# Altium PCB WB-AV-4510-CAN.PcbDoc (part 1 of 2)
Units mil, origin at the board's own origin, x right, y up, seen from the top; angles counter-clockwise.
Board outline 5777.56 x 2549.21 mil, 2 copper layers (Top Layer, Bottom Layer); 81 components, 160 nets, 544 pads, 0 vias.
Unrouted connection lines stored in the file: 266.
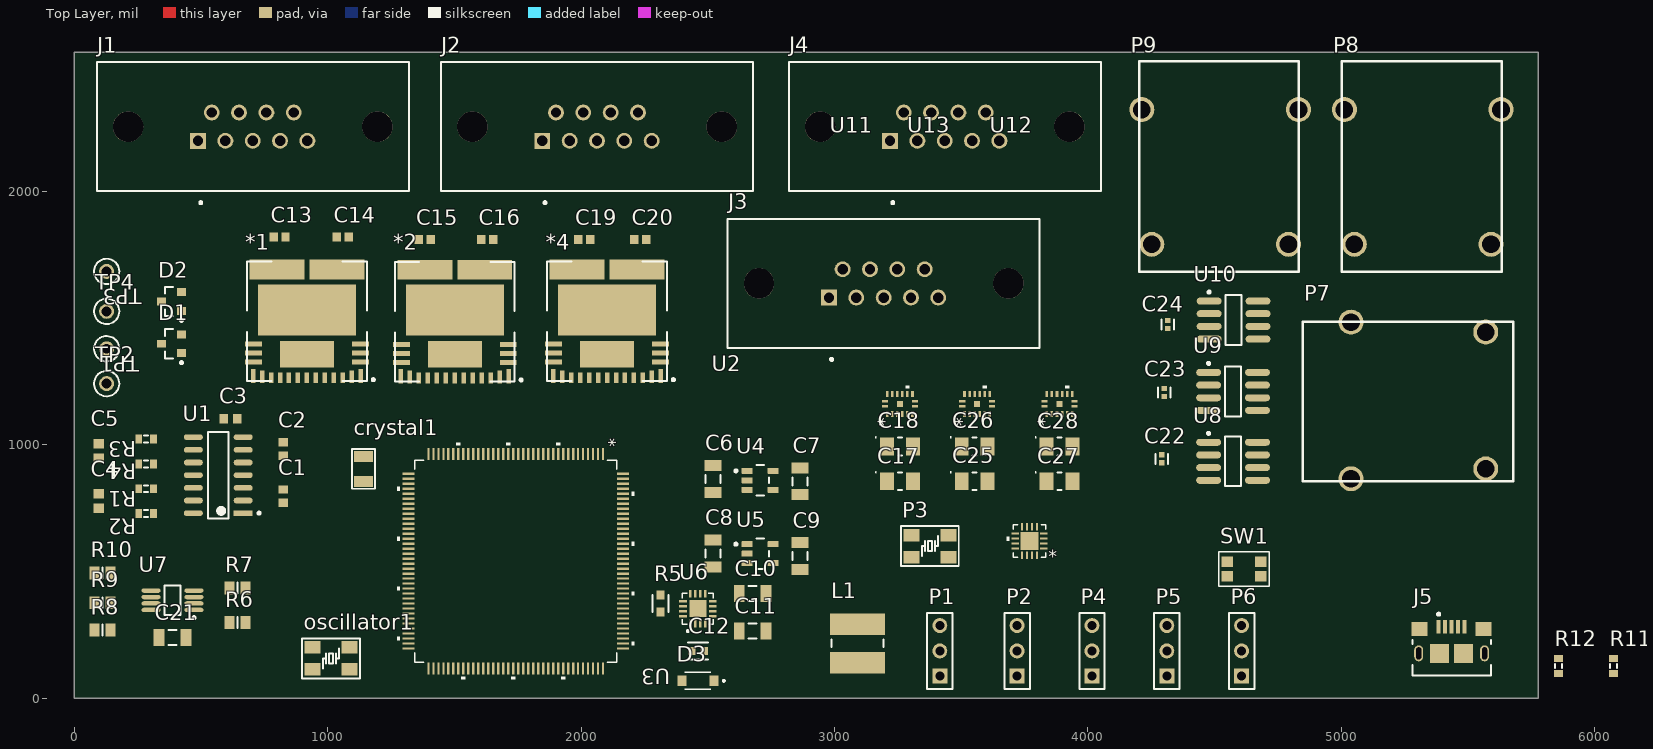
[diagram p0: Top Layer view]
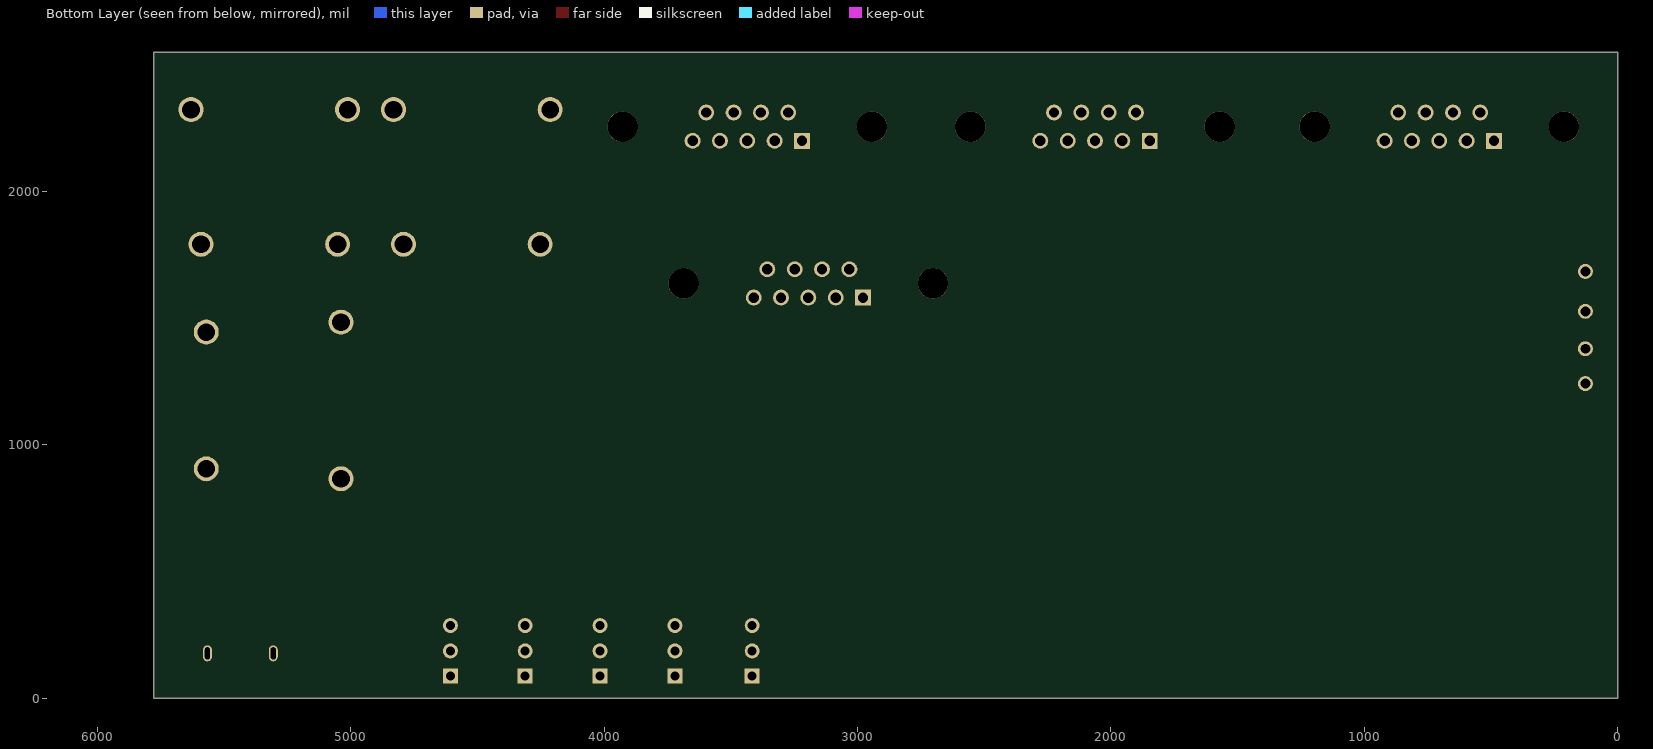
[diagram p1: Bottom Layer view, seen from below]

## Layer stack, top to bottom
Top Solder: solder mask 0.4, Solder Resist, Dk 3.5
Top Layer: signal copper 1.4
Dielectric 1: dielectric 12.6, FR-4, Dk 4.8
Bottom Layer: signal copper 1.4
Bottom Solder: solder mask 0.4, Solder Resist, Dk 3.5

## Board outline
5777.56,0 5777.56,2549.21 0,2549.21 0,0

## Design rules (kind name [scope] priority, off if disabled: settings)
Clearance [All] p1: gap=10 ignorepadtopadclearanceinfootprint=FALSE except(0: Arc-Hole Track-Hole SMDPad-Hole THPad-Hole Via-Hole Fill-Hole Poly-Hole Region-Hole Text-Hole)
DiffPairsRouting [All] p1: maxlimit=10 minlimit=10 mostfreqgap=10 toplayer_minwidth=15 toplayer_maxwidth=15 toplayer_prefwidth=15 bottomlayer_minwidth=15 bottomlayer_maxwidth=15 bottomlayer_prefwidth=15 maxuncoupledlength=500
PolygonConnect [All] p1: connectstyle=Relief reliefconductorwidth=10 reliefentries=4 polygonreliefangle="90 Angle" airgapwidth=10
RoomDefinition CANbus [InComponentClass('CANbus')] p1: confinementstyle=ConfineIn formatcopy=TRUE lockcomponents=FALSE outline 44.83,699.65 44.83,1053.31 63.03,1053.31 63.03,1749.26 71.1,1749.26 71.1,2519.65 1337.95,2519.65 1337.95,1927.4 866.02,1927.4 866.02,733.11 749.52,733.11 749.52,686.18 408.54,686.18 408.54,694.72 224.95,694.72 224.95,699.65
RoomDefinition Thermocouple [InComponentClass('Thermocouple')] p2: confinementstyle=ConfineIn formatcopy=TRUE lockcomponents=FALSE outline 4149.39,1667.83 4149.39,2527.83 4893.92,2527.83 4893.92,2517.99 5693.13,2517.99 5693.13,1657.99 5666.81,1657.99 5666.81,802.93 4806.81,802.93 4806.81,806.06 4396.22,806.06 4396.22,899.45 4252.4,899.45 4252.4,1667.83
RoomDefinition eFuse [InComponentClass('eFuse')] p3: confinementstyle=ConfineIn formatcopy=TRUE lockcomponents=FALSE outline 655.35,1224.25 655.35,1750.16 755.68,1750.16 755.68,1855.47 1429.37,1855.47 1429.37,2519.65 2801.61,2519.65 2801.61,2526.34 4068.46,2526.34 4068.46,2211.59 4213.5,2211.59 4213.5,2211.46 4538.46,2211.46 4538.46,772.42 3591.8,772.42 3591.8,772.55 2961.72,772.55 2961.72,1223.27 1239.02,1223.27 1239.02,1224.25
RoomDefinition Temp_Sensor [InComponentClass('Temp_Sensor')] p4: confinementstyle=ConfineIn formatcopy=TRUE lockcomponents=FALSE outline 45.12,227.2 45.12,536.57 179.29,536.57 179.29,477.52 710.79,477.52 710.79,256.73 478.5,256.73 478.5,189.8 297.09,189.8 297.09,227.2
RoomDefinition MCU [InComponentClass('MCU')] p5: confinementstyle=ConfineIn formatcopy=TRUE lockcomponents=FALSE outline 885.67,64.8 885.67,250.16 1082.52,250.16 1082.52,998.19 1260.13,998.19 1260.13,1038.61 2494.74,1038.61 2494.74,1270.8 4220.19,1270.8 4220.19,728.08 4729.14,728.08 4729.14,567.08 4670.24,567.08 4670.24,23.07 2580.87,23.07 2580.87,14.61 2358.31,14.61 2358.31,59.11 1260.13,59.11 1260.13,64.8
RoutingVias [All] p1: holewidth=28 width=50 viastyle="Through Hole" minholewidth=28 minwidth=50 maxholewidth=28 maxwidth=50
SolderMaskExpansion [All] p1: expansion=4 istentingtop=FALSE
Width [All] p1: maxlimit=10 minlimit=10 preferedwidth=10
29 further rules are at their usual default settings.

## Classes and differential pairs
component class Thermocouple: C22 C23 C24 P7 P8 P9 U8 U9 U10
component class Temp_Sensor: C21 R6 R7 R8 R9 R10 U7
component class eFuse: *1 *2 *4 C13 C14 C15 C16 C17 C18 C19 C20 C25 C26 C27 C28 J2 J3 J4 U11 U12 U13
component class MCU: C6 C7 C8 C9 C10 C11 C12 crystal1 D3 J5 L1 oscillator1 P1 P2 P3 P4 P5 P6 R5 R11 R12 SW1 U2 U3 U4 U5 U6
component class CANbus: C1 C2 C3 C4 C5 D1 D2 J1 R1 R2 R3 R4 TP1 TP2 TP3 TP4 U1
differential pair CAN2: +CAN2_P -CAN2_N
differential pair CAN1: +CAN1_P -CAN1_N

## Components (designator, comment, footprint, x,y, rotation, side; value= is the part's Value field where it differs from the comment)
*1 "MC06XS4200" PQFN50P1200X1200X220_HS-33N 918.31,1487.2 r180 top
*2 "MC06XS4200" PQFN50P1200X1200X220_HS-33N 1501.97,1486.22 r180 top
*4 "MC06XS4200" PQFN50P1200X1200X220_HS-33N 2102.36,1487.2 r180 top
C1 "GRM1885C1H101JA01D" CAPC1608X90X35NL10T15 825.5,797.24 r270 top value=100pF
C2 "GRM1885C1H101JA01D" CAPC1608X90X35NL10T15 825.5,984.25 r270 top value=100pF
C3 "GRM1885C1H101JA01D" CAPC1608X90X35NL10T15 615.86,1102.36 r180 top value=100pF
C4 "GRM188R71H472KA01D" CAPC1608X90X35ML10T15 97.16,777.56 r270 top value=4.7nF
C5 "GRM188R71H472KA01D" CAPC1608X90X35ML10T15 97.16,975.39 r90 top value=4.7nF
C6 "Cap" C1206 2519.68,865.91 r90 top value=22uF
C7 "Cap" C1206 2864.17,856.3 r90 top value=22uF
C8 "Cap" C1206 2519.68,570.87 r90 top value=22uF
C9 "Cap" C1206 2864.17,560.8 r90 top value=22uF
C10 "Cap" C1206 2677.17,412.65 r0 top value=22uF
C11 "Cap" C1206 2677.17,265.02 r0 top value=22uF
C12 "CL10B223KB8NNWC" FP-CL10-IPC_C 2460.63,186.28 r180 top
C13 "Cap" CAPC1608X95X40LL15T15 810.04,1820.87 r180 top value=100pF
C14 "Cap" CAPC1608X95X40LL15T15 1059.06,1820.87 r0 top value=100pF
C15 "Cap" CAPC1608X95X40LL15T15 1383.86,1811.02 r180 top value=100pF
C16 "Cap" CAPC1608X95X40LL15T15 1629.92,1811.02 r180 top value=100pF
C17 "TAJA106K016RNJ" CAPMP3217X18-T_V 3257.87,856.3 r0 top
C18 "TAJA106K016RNJ" CAPMP3217X18-T_V 3257.87,994.09 r0 top
C19 "Cap" CAPC1608X95X40LL15T15 2011.81,1811.02 r180 top value=100pF
C20 "Cap" CAPC1608X95X40LL15T15 2234.25,1811.02 r180 top value=100pF
C21 "Cap Semi" C1206 387.8,239.17 r180 top value=1uF
C22 "C0402C104K8PACTU" FP-C0402-BB-MFG 4291.34,944.88 r90 top value=100nF
C23 "C0402C104K8PACTU" FP-C0402-BB-MFG 4301.18,1206.69 r90 top value=100nF
C24 "C0402C104K8PACTU" FP-C0402-BB-MFG 4314.69,1474.33 r90 top value=100nF
C25 "TAJA106K016RNJ" CAPMP3217X18-T_V 3553.15,856.3 r0 top
C26 "TAJA106K016RNJ" CAPMP3217X18-T_V 3553.15,994.09 r0 top
C27 "TAJA106K016RNJ" CAPMP3217X18-T_V 3887.8,856.3 r0 top
C28 "TAJA106K016RNJ" CAPMP3217X18-T_V 3887.8,994.09 r0 top
crystal1 "SMD_Crystal" ECS-.327-CDX-1128 1141.73,905.51 r270 top value=32.768kHz
D1 "NUP2105LT1G" ONSC-SOT-23-3-318-08_V 383.86,1398.91 r180 top
D2 "NUP2105LT1G" ONSC-SOT-23-3-318-08_V 383.86,1566.23 r180 top
D3 "Diode 10TQ035" *SODFL3517X110N 2460.63,68.9 r180 top
J1 "1-5747150-6" FP-1-5747150-6-MFG#1 704.53,2255.43 r180 top
J2 "1-5747150-6" FP-1-5747150-6-MFG#2 2062.8,2255.43 r180 top
J3 "1-5747150-6" FP-1-5747150-6-MFG#1 3193.9,1637.01 r180 top
J4 "1-5747150-6" FP-1-5747150-6-MFG#1 3435.04,2255.43 r180 top
J5 "10118193-0001LF" FCI-10118193-0001LF-5_V 5435.04,230.32 r0 top
L1 "744774047" WE-PD2-M 3090.55,216.54 r90 top
oscillator1 "SMD_oscillator" ECS-160-8-30B-CKM 1013.78,157.48 r180 top value=16MHz
P1 "Header 3" HDR1X3 3415.35,87.01 r90 top
P2 "Header 3" HDR1X3 3720.47,87.01 r90 top
P3 "FTSH-105-01-L-DV-K" ECS-160-8-30B-CKM 3375.98,600.17 r0 top
P4 "Header 3" HDR1X3 4015.75,87.01 r90 top
P5 "Header 3" HDR1X3 4311.02,87.01 r90 top
P6 "Header 3" HDR1X3 4606.3,87.01 r90 top
P7 "Header 2H" "Thermocouple F" 5038.13,866.14 r90 top
P8 "Header 2H" "Thermocouple F" 5011.81,2322.83 r0 top
P9 "Header 2H" "Thermocouple F" 4212.6,2322.83 r0 top
R1 "Res3" J1-0603 284.17,826.77 r0 top value=60
R2 "Res3" J1-0603 284.17,728.35 r180 top value=60
R3 "Res3" J1-0603 284.17,1023.62 r0 top value=60
R4 "Res3" J1-0603 284.17,925.2 r180 top value=60
R5 "AT0603DRD0710KL" FP-AT0603-MFG 2312.99,373.28 r90 top value=10KΩ
R6 "Res3" 6-0805_L 643.7,298.23 r0 top value=10k
R7 "Res3" 6-0805_L 643.7,436.02 r0 top value=10k
R8 "Res3" 6-0805_L 112.2,268.7 r180 top value=10k
R9 "Res3" 6-0805_L 112.2,376.97 r180 top value=10k
R10 "Res3" 6-0805_L 112.2,495.08 r180 top value=10k
R11 "Res3" J1-0603 6072.82,126.49 r90 top value=33
R12 "Res3" J1-0603 5856.29,126.49 r90 top value=33
SW1 "SW-PB" P13348SCT-ND 4616.14,482.28 r180 top
TP1 "5003" KSTN-5003 127.95,1379.22 r180 top
TP2 "5003" KSTN-5003 127.95,1241.43 r180 top
TP3 "5003" KSTN-5003 127.95,1684.34 r180 top
TP4 "5003" KSTN-5003 127.95,1526.86 r180 top
U1 "TJA1048T,118" FP-SOT108-1-IPC_B 568.26,880.24 r180 top
U2 "Part Number: MKL02Z32VFG4" QFN-16_3X3X0.65 3769.68,620.08 r180 top value=Value
U3 "MK66FX1M0VLQ18" 98ASS23177W 1742.13,541.11 r270 top
U4 "TLV75533PDBVR" FP-DBV0005A-MFG 2706.3,859.9 r0 top
U5 "TLV75533PDBVR" FP-DBV0005A-MFG 2706.3,570.64 r0 top
U6 "TS30042-M050QFNR" *QFN50P300X300X100-17N 2460.63,353.6 r90 top
U7 "MCP9808T-E/MS" MCHP-MSOP-MS8_M 387.8,386.81 r180 top
U8 "MAX31855KASA+" MAXM-S8+4_M 4572.56,935.16 r0 top
U9 "MAX31855KASA+" MAXM-S8+4_M 4572.56,1210.75 r0 top
U10 "MAX31855KASA+" MAXM-S8+4_M 4574.53,1492.44 r0 top
U11 "MAX11192ATE+" 21-100030A_T1623CN+1_MXM 3257.72,1161.55 r90 top
U12 "MAX11192ATE+" 21-100030A_T1623CN+1_MXM 3887.8,1161.42 r90 top
U13 "MAX11192ATE+" 21-100030A_T1623CN+1_MXM 3562.83,1161.55 r90 top

## Footprints (in the part's own frame and the unit in brackets; to place one, negate y for a bottom-side part, rotate by r counter-clockwise, add the part's x,y. Pads: shape width x height; smd on the part's side, far side on the other; paste and mask are expansions set on the pad)
6-0805_L [mm] "Chip Resistor, Body 2.0x1.2mm, IPC High Density"
  rect 1x1.3 smd: 1(-0.8,0) 2(0.8,0)
  silkscreen extent 0,-0.55 0,0.55, body extent -1.07,-0.7 1.07,0.7, height 0.7
21-100030A_T1623CN+1_MXM [mil]
  rect 24x10 smd paste+0 mask+0: 1(-39.5,50) 2(-39.5,30) 3(-39.5,10) 4(-39.5,-10) 5(-39.5,-30) 6(-39.5,-50) 9(39.5,-50) 10(39.5,-30) 11(39.5,-10) 12(39.5,10) 13(39.5,30) 14(39.5,50)
  rect 10x24 smd paste+0 mask+0: 7(-10,-59) 8(10,-59) 15(10,59) 16(-10,59)
  rect 24x24 smd paste+0 mask+0: 17(0,0)
  silkscreen extent 62,-37 72,-22, body extent 0,0 10,10, height 10
98ASS23177W [mil]
  rect 48x9 smd paste+0 mask+0: 1(-423,344.49) 2(-423,324.8) 3(-423,305.12) 4(-423,285.43) 5(-423,265.75) 6(-423,246.06) 7(-423,226.38) 8(-423,206.69) 9(-423,187.01) 10(-423,167.32) 11(-423,147.64) 12(-423,127.95) 13(-423,108.27) 14(-423,88.58) 15(-423,68.9) 16(-423,49.21) 17(-423,29.53) 18(-423,9.84) 19(-423,-9.84) 20(-423,-29.53) 21(-423,-49.21) 22(-423,-68.9) 23(-423,-88.58) 24(-423,-108.27) 25(-423,-127.95) 26(-423,-147.64) 27(-423,-167.32) 28(-423,-187.01) 29(-423,-206.69) 30(-423,-226.38) 31(-423,-246.06) 32(-423,-265.75) 33(-423,-285.43) 34(-423,-305.12) 35(-423,-324.8) 36(-423,-344.49) 73(423,-344.49) 74(423,-324.8) 75(423,-305.12) 76(423,-285.43) 77(423,-265.75) 78(423,-246.06) 79(423,-226.38) 80(423,-206.69) 81(423,-187.01) 82(423,-167.32) 83(423,-147.64) 84(423,-127.95) 85(423,-108.27) 86(423,-88.58) 87(423,-68.9) 88(423,-49.21) 89(423,-29.53) 90(423,-9.84) 91(423,9.84) 92(423,29.53) 93(423,49.21) 94(423,68.9) 95(423,88.58) 96(423,108.27) 97(423,127.95) 98(423,147.64) 99(423,167.32) 100(423,187.01) 101(423,206.69) 102(423,226.38) 103(423,246.06) 104(423,265.75) 105(423,285.43) 106(423,305.12) 107(423,324.8) 108(423,344.49)
  rect 9x48 smd paste+0 mask+0: 37(-344.49,-423) 38(-324.8,-423) 39(-305.12,-423) 40(-285.43,-423) 41(-265.75,-423) 42(-246.06,-423) 43(-226.38,-423) 44(-206.69,-423) 45(-187.01,-423) 46(-167.32,-423) 47(-147.64,-423) 48(-127.95,-423) 49(-108.27,-423) 50(-88.58,-423) 51(-68.9,-423) 52(-49.21,-423) 53(-29.53,-423) 54(-9.84,-423) 55(9.84,-423) 56(29.53,-423) 57(49.21,-423) 58(68.9,-423) 59(88.58,-423) 60(108.27,-423) 61(127.95,-423) 62(147.64,-423) 63(167.32,-423) 64(187.01,-423) 65(206.69,-423) 66(226.38,-423) 67(246.06,-423) 68(265.75,-423) 69(285.43,-423) 70(305.12,-423) 71(324.8,-423) 72(344.49,-423) 109(344.49,423) 110(324.8,423) 111(305.12,423) 112(285.43,423) 113(265.75,423) 114(246.06,423) 115(226.38,423) 116(206.69,423) 117(187.01,423) 118(167.32,423) 119(147.64,423) 120(127.95,423) 121(108.27,423) 122(88.58,423) 123(68.9,423) 124(49.21,423) 125(29.53,423) 126(9.84,423) 127(-9.84,423) 128(-29.53,423) 129(-49.21,423) 130(-68.9,423) 131(-88.58,423) 132(-108.27,423) 133(-127.95,423) 134(-147.64,423) 135(-167.32,423) 136(-187.01,423) 137(-206.69,423) 138(-226.38,423) 139(-246.06,423) 140(-265.75,423) 141(-285.43,423) 142(-305.12,423) 143(-324.8,423) 144(-344.49,423)
  silkscreen extent -467,-467 467,467, body extent -433,-433 433,433, height 63
*QFN50P300X300X100-17N [mm]
  rect 0.76x0.26 smd: 1(-1.485,0.75) 2(-1.485,0.25) 3(-1.485,-0.25) 4(-1.485,-0.75) 9(1.485,-0.75) 10(1.485,-0.25) 11(1.485,0.25) 12(1.485,0.75)
  rect 0.26x0.76 smd: 5(-0.75,-1.485) 6(-0.25,-1.485) 7(0.25,-1.485) 8(0.75,-1.485) 13(0.75,1.485) 14(0.25,1.485) 15(-0.25,1.485) 16(-0.75,1.485)
  rect 1.7x1.7 smd: 17(0,0)
  silkscreen extent -2.29,-1.55 1.55,1.55, body extent -1.5,-1.5 1.5,1.5, height 0.98
*SODFL3517X110N [mm]
  rect 0.91x1.07 smd: A(1.605,0) C(-1.605,0)
  silkscreen extent -2.7,-0.85 1.3,0.85
C1206 [mm] "Chip Capacitor, Body 3.2x1.6mm, IPC High Density"
  rect 1.1x1.7 smd: 1(-1.35,0) 2(1.35,0)
  silkscreen extent -0.4,-0.75 0.4,0.75, body extent -1.7,-0.9 1.7,0.9, height 1.3
CAPC1608X90X35ML10T15 [mm] "Chip Capacitor, 2-Leads, Body 1.60x0.80mm, IPC Low Density"
  rect 0.95x1.05 smd: 1(-0.725,0) 2(0.725,0)
  body extent -0.85,-0.45 0.85,0.45, height 0.9
CAPC1608X90X35NL10T15 [mm] "Chip Capacitor, 2-Leads, Body 1.60x0.80mm, IPC Medium Density"
  rect 0.85x0.95 smd: 1(-0.675,0) 2(0.675,0)
  body extent -0.85,-0.45 0.85,0.45, height 0.9
CAPC1608X95X40LL15T15 [mm] "Chip Capacitor, 2-Leads, Body 1.60x0.80mm, IPC High Density"
  rect 0.85x0.9 smd: 1(-0.6,0) 2(0.6,0)
  body extent -0.87,-0.48 0.88,0.48, height 0.95
CAPMP3217X18-T_V [mm] "Molded Capacitor, 2-Leads, Body 3.40x1.8mm"
  rect 1.4x1.8 smd: 1(-1.3,0) 2(1.3,0)
  silkscreen extent -2.45,-0.9 0.2,0.95, body extent -1.92,-0.9 1.92,0.9, height 1.8
ECS-160-8-30B-CKM [mm] "ECS-160-8-30B-CKM"
  rect 1.6x1.25 smd paste+0 mask+0.05: 1(-1.85,-1.1) 2(1.85,-1.1) 3(1.85,1.1) 4(-1.85,1.1)
  silkscreen extent -2.9,-2 2.9,2, body extent -2.5,-1.6 2.5,1.6, height 0.85
ECS-.327-CDX-1128 [mm] "ECS-.327-CDX-1128"
  rect 1.1x1.9 smd paste+0 mask+0.05: 1(-1.25,0) 2(1.25,0)
  silkscreen extent -2,-1.15 2,1.15, body extent -1.6,-0.75 1.6,0.75, height 0.9
FCI-10118193-0001LF-5_V [mm] "Micro, USB-B, 5-Leads, Body 7.86x5.05mm, Pitch 0.65 mm"
  rect 0.4x1.35 smd: 1(-1.3,1.325) 2(-0.65,1.325) 3(0,1.325) 4(0.65,1.325) 5(1.3,1.325)
  rect 1.6x1.4 smd: 6(-3.2,1.1) 7(3.2,1.1)
  rect 1.9x1.9 smd: 8(-1.2,-1.35) 9(1.2,-1.35)
  oval 0.9x1.6 hole 0.5 slot 1.2 at 90 deg: 10(-3.3,-1.35) 11(3.3,-1.35)
  silkscreen extent -3.93,-3.55 3.93,2.7, body extent -3.93,-4.16 3.93,1.5, height 2.83
FP-1-5747150-6-MFG#1 [mm]
  rect 1.59x1.59 hole 1.04 paste-1000 mask+0: 1(5.485,1.42)
  round 1.59 hole 1.04 paste-1000 mask+0: 2(2.745,1.42) 3(0.005,1.42) 4(-2.735,1.42) 5(-5.475,1.42) 6(4.115,-1.42) 7(1.375,-1.42) 8(-1.365,-1.42) 9(-4.105,-1.42)
  round 3.05 hole 3.05 unplated paste-1000 mask+0: ""(-12.495,0) ""(12.495,0)
  silkscreen extent -15.64,-6.47 15.64,7.74, body extent -15.74,-6.57 15.74,6.57, height 0.25
FP-1-5747150-6-MFG#2 [mm]
  rect 1.59x1.59 hole 1.04 paste-1000 mask+0: 1(5.485,1.42)
  round 1.59 hole 1.04 paste-1000 mask+0: 2(2.745,1.42) 3(0.005,1.42) 4(-2.735,1.42) 5(-5.475,1.42) 6(4.115,-1.42) 7(1.375,-1.42) 8(-1.365,-1.42)
  round 1.59 hole 1.04: 9(-4.105,-1.42)
  round 3.05 hole 3.05 unplated paste-1000 mask+0: ""(-12.495,0) ""(12.495,0)
  silkscreen extent -15.64,-6.47 15.64,7.74, body extent -15.74,-6.57 15.74,6.57, height 0.25
FP-AT0603-MFG [mm]
  rect 0.9x0.8 smd paste+0 mask+0: 1(-0.85,0) 2(0.85,0)
  silkscreen extent -0.85,-0.8 0.85,0.8, body extent -1.4,-0.55 1.4,0.55, height 0.25
FP-C0402-BB-MFG [mm]
  rect 0.52x0.52 smd paste+0 mask+0: 1(-0.4,0) 2(0.4,0)
  silkscreen extent -0.5,-0.64 0.5,0.64, body extent -0.8,-0.4 0.8,0.4, height 0.25
FP-CL10-IPC_C [mil]
  rect 29.85x31.97 smd paste+0 mask+0: 1(-24.68,0) 2(24.68,0)
  silkscreen extent -40,-33 40,33, body extent -44,-22 44,22, height 10
FP-DBV0005A-MFG [mm]
  rrect17% 1.1x0.6 smd paste+0 mask+0: 1(-1.3,0.95) 2(-1.3,0) 3(-1.3,-0.95) 4(1.3,-0.95) 5(1.3,0.95)
  silkscreen extent -2.55,-1.53 0.87,1.52, body extent -1.95,-1.78 1.95,1.78, height 0.25
FP-SOT108-1-IPC_B [mil]
  rect 74.98x22.36 smd paste+0 mask+0: 1(-98.46,150)
  rrect100% 74.98x22.36 smd paste+0 mask+0: 2(-98.46,100) 3(-98.46,50) 4(-98.46,0) 5(-98.46,-50) 6(-98.46,-100) 7(-98.46,-150) 8(98.46,-150) 9(98.46,-100) 10(98.46,-50) 11(98.46,0) 12(98.46,50) 13(98.46,100) 14(98.46,150)
  silkscreen extent -166,-170 41,170, body extent -146,-180 146,180, height 10
HDR1X3 [mm] "Connector; Header; 3 Position"
  rect 1.5x1.5 hole 0.9: 1(0,0)
  round 1.5 hole 0.9: 2(2.54,0) 3(5.08,0)
  silkscreen extent -1.27,-1.27 6.35,1.27
J1-0603 [mm] "Chip Resistor, Body 1.6x0.8mm, IPC High Density"
  rect 0.7x0.9 smd: 1(-0.75,0) 2(0.75,0)
  silkscreen extent -0.2,-0.35 0.2,0.35, body extent -0.85,-0.48 0.85,0.48, height 0.9
KSTN-5003 [mm] "Test Point, Through Hole, Dia 2.54mm"
  round 1.5 hole 1: 1(0,0)
  silkscreen extent -1.27,-1.27 1.27,1.27, body extent -1.27,-1.27 1.27,1.27, height 4.57
MAXM-S8+4_M [mm] "SOIC, 8-Leads, Body 4.9x3.9mm, Pitch 1.27mm, IPC Low Density"
  oval 2.5x0.7 smd: 1(-2.45,1.905) 2(-2.45,0.635) 3(-2.45,-0.635) 4(-2.45,-1.905) 5(2.45,-1.905) 6(2.45,-0.635) 7(2.45,0.635) 8(2.45,1.905)
  silkscreen extent -2.57,-2.5 0.8,2.93, body extent -2,-2.5 2,2.5, height 1.75
MCHP-MSOP-MS8_M [mm] "SOP, 8-Leads, Body 3x3mm, Pitch 0.65mm, IPC Low Density"
  oval 1.9x0.45 smd: 1(-2.15,0.975) 2(-2.15,0.325) 3(-2.15,-0.325) 4(-2.15,-0.975) 5(2.15,-0.975) 6(2.15,-0.325) 7(2.15,0.325) 8(2.15,0.975)
  silkscreen extent -2.28,-1.5 0.8,1.87, body extent -1.5,-1.5 1.5,1.5, height 1.1
ONSC-SOT-23-3-318-08_V [mm] "SOT23, 3-Leads, Body 2.92x1.3mm, Pitch 0.95mm"
  rect 0.9x0.8 smd: 1(-1,0.95) 2(-1,-0.95) 3(1,0)
  silkscreen extent -1.13,-1.46 0.65,2.02, body extent -0.65,-1.46 0.65,1.46, height 1.11
P13348SCT-ND [mm]
  rect 1.15x1.05 smd: 1(-1.675,0) 1(1.675,0) 2(-1.675,-1.45) 2(1.675,-1.45)
  silkscreen extent -2.54,-2.41 2.54,1.02
PQFN50P1200X1200X220_HS-33N [mm] "PQFN, 32-Leads, Body 12.00x12.00mm, Pitch 0.50mm, Thermal Pad 4.00x2.20mm, IPC Medium Density"
  rect 0.45x1.45 smd: 1(-5.4,5.475) 13(5.4,5.475)
  rect 0.45x1.3 smd: 2(-4.5,5.55) 12(4.5,5.55)
  rect 0.45x1.1 smd: 3(-3.6,5.65) 4(-2.7,5.65) 5(-1.8,5.65) 6(-0.9,5.65) 7(0,5.65) 8(0.9,5.65) 9(1.8,5.65) 10(2.7,5.65) 11(3.6,5.65)
  rect 5.4x2.65 smd: 14(0,3.275)
  rect 9.8x5.1 smd: 15(0,-1.15)
  rect 1.7x0.5 smd: 16(5.35,4.075) 17(5.35,3.175) 18(5.35,2.275) 21(-5.35,2.275) 22(-5.35,3.175) 23(-5.35,4.075)
  rect 5.5x2 smd: 19(3,-5.2) 20(-3,-5.2)
  silkscreen extent -6.78,-6 6,6, body extent -6,-6 6,6, height 2.2
QFN-16_3X3X0.65 [mm]
  rect 0.755x0.198 smd paste+0 mask+0: 1(-1.427,0.75) 2(-1.427,0.25) 3(-1.427,-0.25) 4(-1.427,-0.75) 9(1.427,-0.75) 10(1.427,-0.25) 11(1.427,0.25) 12(1.427,0.75)
  rect 0.198x0.755 smd paste+0 mask+0: 5(-0.75,-1.427) 6(-0.25,-1.427) 7(0.25,-1.427) 8(0.75,-1.427) 13(0.75,1.427) 14(0.25,1.427) 15(-0.25,1.427) 16(-0.75,1.427)
  rect 1.8x1.8 smd paste-0.887 mask+0: 17(0,0)
  silkscreen extent -1.63,-1.63 2.31,1.63, body extent 0,0 0.25,0.25, height 0.25
"Thermocouple F" [mm]
  round 2.5 hole 1.77: 13(0,0) 14(15.7,0) 15(1,-13.5) 16(14.7,-13.5)
  silkscreen extent -0.25,-16.26 15.75,4.83, body extent -0.08,-16.11 15.62,4.68, height 7.35
WE-PD2-M [mm] "SMD Inductor, 2-Leads, Body 5.8 x 5.2 mm"
  rect 2.15x5.5 smd: 1(-1.925,0) 2(1.925,0)
  silkscreen extent -0.38,-2.6 0.38,2.6, body extent -2.89,-2.6 2.89,2.6, height 4.49

## Part data
C1 C2 C3: library part CMP-2006-02595-1, Manufacturer=Murata, Part Number=GRM1885C1H101JA01D
C4 C5: library part CMP-2006-02924-1, Manufacturer=Murata, Part Number=GRM188R71H472KA01D
C6 C7 C8 C9 C10 C11: "Multilayer Ceramic Capacitor, WCAP-CSGP Series, 22 F, 10%, X7R, 10 V, 1206 [3216 Metric] RoHS Compliant: Yes", Capacitance=22uF, Case Code (Imperial)=1206, Case Code (Metric)=3216, Dielectric=X7R, Manufacturer="Wurth Electronics", Manufacturer Part Number=885012208019, Max Operating Temperature=125°C, Min Operating Temperature=-55°C, Supplier Part Number 1=732-7566-1-ND, Tolerance=10%, Voltage Rating=10V, Case/Package=1206, Category="Ceramic Capacitors", ComponentLink1Description=http://www.farnell.com/datasheets/1958502.pdf?src-supplier=Farnell, ComponentLink1URL=http://www.farnell.com/datasheets/1958502.pdf?src-supplier=Farnell, ComponentLink2Description=https://katalog.we-online.de/pbs/datasheet/885012208019.pdf?src-supplier=Digi-Key, ComponentLink2URL=https://katalog.we-online.de/pbs/datasheet/885012208019.pdf?src-supplier=Digi-Key, ComponentLink3Description=http://www.farnell.com/datasheets/1958502.pdf?src-supplier=Element14, ComponentLink3URL=http://www.farnell.com/datasheets/1958502.pdf?src-supplier=Element14, ComponentLink4Description=http://www.farnell.com/datasheets/1958502.pdf?src-supplier=Newark, ComponentLink4URL=http://www.farnell.com/datasheets/1958502.pdf?src-supplier=Newark, LatestRevisionDate=17-Jul-2002, LatestRevisionNote="Re-released for DXP Platform.", Length=0.126inch, Mount="Surface Mount", PackageDescription="Radial Cap, Thru-Hole; 2 Leads; 0.3 in Pin Spacing", PackageReference=RAD-0.3, Packaging="Cut Tape", Pricing 1="1=0.77000, 10=0.69600, 100=0.62400, 500=0.55200 (USD)", Published=8-Jun-2000, Publisher="Altium Limited", REACH SVHC=Unknown, RoHS=Yes, Stock 1=2258, Supplier 1=Digi-Key, Thickness=0.075inch, Voltage Rating (DC)=10V, Width=0.063inch
C12: library part CMP-13271-000478-1, "Cap Ceramic 22nF 50V X7R ±10% Pad SMD 0603 +125°C T/R", Capacitance=22nF, Case Code (Imperial)=0603, Case Code (Metric)=1608, Max Operating Temperature=125°C, Min Operating Temperature=-55°C, Package Quantity=1, Tolerance=10%, Voltage Rating=50V, Case/Package=0603, Length=0.063inch, Mount="Surface Mount", Packaging="Cut Tape", Thickness=0.035inch, Width=0.031inch
C13 C14 C15 C16 C19 C20: "MULTICOMP - MC0603F223Z500CT - KONDENSATOR, 0.022µF, 50V, Y5V, 0603", Capacitance=22nF, Case Code (Imperial)=0603, Case Code (Metric)=1608, Dielectric=Y5V, Manufacturer=Multicomp, Manufacturer Part Number=MC0603F223Z500CT, Max Operating Temperature=85°C, Min Operating Temperature=-30°C, Supplier Part Number 1=720-1526-1-ND, Tolerance=-20%, Voltage Rating=50V, Case/Package=0603, Category=Capacitors, ComponentLink1Description=https://datasheet.ciiva.com/46443/1870456-46443401.pdf?src-supplier=Element14, ComponentLink1URL=https://datasheet.ciiva.com/46443/1870456-46443401.pdf?src-supplier=Element14, ComponentLink2Description=https://datasheet.ciiva.com/46443/1870456-46443402.pdf?src-supplier=Element14, ComponentLink2URL=https://datasheet.ciiva.com/46443/1870456-46443402.pdf?src-supplier=Element14, LatestRevisionDate=17-Jul-2002, LatestRevisionNote="Re-released for DXP Platform.", PackageDescription="Radial Cap, Thru-Hole; 2 Leads; 0.3 in Pin Spacing", PackageReference=RAD-0.3, Packaging="Cut Tape", Pricing 1="10=0.01100, 25=0.01100, 100=0.01100, 250=0.01100, 500=0.01100, 1000=0.01100 (CAD)", Published=8-Jun-2000, Publisher="Altium Limited", REACH SVHC=Unknown, RoHS=Yes, Stock 1=9682, Supplier 1=Digi-Key, Voltage Rating (DC)=50V
C17 C18 C25 C26 C27 C28: library part CMP-1661-00004-1, "Standard Tantalum, 10 uF, +/- 10%, 16 V, -55 to 125 degC, 2-Pin SMD (1206), RoHS, Tape and Reel", Case\Package=SOT-26, Frequency="300 MHz", Max Operating Temperature="150 degC", Max Power Dissipation="300 mW", Min Operating Temperature="-55 degC", Package Quantity=3000, ComponentLink1Description="Manufacturer URL", ComponentLink1URL=http://www.avx.com/, ComponentLink2Description=Datasheet, ComponentLink2URL=http://datasheets.avx.com/TAJ.pdf, ComponentLink3Description="Package Specification", ComponentLink3URL=http://www.avx.com/download/software/literature/AVX-Footprint-Library.pdf, DatasheetVersion=Feb-16, Elements=2, Height="1.3 mm", hFE Min=60, Length="3.1 mm", Mount="Surface Mount", PackageDescription="2-Pin Surface Mount Device, Body 3.2 x 1.65 mm", PackageReference=CAPMP3217X18-T, Packaging="Tape and Reel", Pins=6, Radiation Hardening=No, REACH SVHC="No SVHC", RoHSCompliant=true, Vce Max="500 mV", Width="1.7 mm"
C21: "Multilayer Ceramic Capacitors MLCC - SMD/SMT 50volts 1uF X7R 10%", Capacitance=1uF, Case Code (Imperial)=1206, Case Code (Metric)=3216, Dielectric=X7R, Dielectric Material=Ceramic, Manufacturer=KEMET, Manufacturer Part Number=C1206C105K5RACTU, Max Operating Temperature=125°C, Min Operating Temperature=-55°C, Package Quantity=1, Supplier Part Number 1=399-8147-1-ND, Tolerance=10%, Voltage=50V, Case/Package=1206, Category="Ceramic Capacitors", ComponentLink1Description=https://datasheet.ciiva.com/7730/kem-c1002-x7r-smd-7730086.pdf?src-supplier=Element14, ComponentLink1URL=https://datasheet.ciiva.com/7730/kem-c1002-x7r-smd-7730086.pdf?src-supplier=Element14, ComponentLink2Description=https://datasheet.ciiva.com/6074/kem-c1002-x7r-smd-6074697.pdf?src-supplier=Farnell, ComponentLink2URL=https://datasheet.ciiva.com/6074/kem-c1002-x7r-smd-6074697.pdf?src-supplier=Farnell, ComponentLink3Description=https://datasheet.ciiva.com/22749/1918693-22749725.pdf?src-supplier=Element14, ComponentLink3URL=https://datasheet.ciiva.com/22749/1918693-22749725.pdf?src-supplier=Element14, Depth=1.6mm, Height=1mm, LatestRevisionDate=29-May-2009, LatestRevisionNote="IPC-7351 Footprint Added.", Length=3.2mm, Mount="Surface Mount", Number of Pins=2, PackageDescription="Chip Capacitor", PackageReference=C1206, Packaging="Tape and Reel", Pricing 1="1=0.30000, 10=0.20900, 50=0.13940, 100=0.11850, 500=0.08364, 1000=0.07318 (USD)", Published=8-Jun-2000, Publisher="Altium Limited", Radiation Hardening=No, REACH SVHC="No SVHC", RoHS=Yes, SPN=732-7692-1-ND, Stock 1=155925, Supplier 1=Digi-Key, Termination=SMD/SMT, Thickness=0.043inch, Voltage Rating=50V, Voltage Rating (DC)=50V, Width=0.063inch
C22 C23 C24: library part CMP-03020-023811-1, "CAP CER 0.1UF 10V X5R 0402", Capacitance="0.10 μF", Manufacturer=Kemet, Package=C0402-BB, Temperature="-55°C to +125°C", Temperature Characteristic=X5R, Temperature Coefficient=15%, Temperature Range High=+125°C, Temperature Range Low=-55°C, Tolerance=0.1, Voltage Rating="10 V", Automotive=No, Category=Cap, ComponentLink2Description=Datasheet, ComponentLink2URL=https://content.kemet.com/datasheets/KEM_C1002_X7R_SMD.pdf, Device Class L1="Passive Components", Device Class L2=Capacitors, Device Class L3="Ceramic Capacitors", Digikey Description="CAP CER 0.1UF 10V X5R 0402", Height=0.55mm, Ipc Land Pattern Name=CAPC10050X50, Lead Free=Yes, Manufacturer Part Number=C0402C104K8PACTU, Material=Ceramic, Mouser Description="Capacitor 100 nF 10 VDC 0402", Octopart=https://octopart.com/c0402c104k8pactu-kemet-140039, RoHS=TRUE
crystal1: library part ECS-.327-CDX-1128, SPN=XC2190CT-ND
D1 D2: library part CMP-1063-00164-1, "Dual Line CAN Bus Protector, 3-Pin SOT-23, Pb-Free, Tape and Reel", Manufacturer="On Semiconductor", C Max (pF)=30, ComponentLink1Description="Manufacturer URL", ComponentLink1URL=http://www.onsemi.com/, ComponentLink2Description=Datasheet, ComponentLink2URL=http://www.onsemi.cn/pub_link/Collateral/NUP2105L-D.PDF, ComponentLink3Description="Package Specification", ComponentLink3URL=http://www.onsemi.cn/pub_link/Collateral/318-08.PDF, DatasheetVersion="Rev. 5", Direction=Bidirectional, IR Max (uA)=0.1, Mounting Technology="Surface Mount", Number of Lines=2, PackageDescription="3-Pin Small Outline Transistor, Body 2.92 x 1.3 mm, Pitch 0.95 mm", PackageReference=SOT-23-3-318-08, PackageVersion="Rev. AP, 11/2009", Packing="Tape and Reel", PartNumber=NUP2105LT1G, PPK Max (W)=350, RoHS=Pb-Free, V(BR) Min (V)=26.2
D3: "Schottky Rectifier", ComponentLink1Description="Manufacturer Link", ComponentLink1URL=http://www.irf.com/, ComponentLink2Description=Datasheet, ComponentLink2URL=http://www.irf.com/product-info/datasheets/data/10tq.pdf, DatasheetVersion=PD-2.057B, LatestRevisionDate=17-Jul-2002, LatestRevisionNote="Re-released for DXP Platform.", Note="Terminal 2 is the TAB and is electrically connected to the cathode", PackageDescription="TO, Thru-Hole, Vertical, Heatsink Mounted; 3 In-Line Leads (1 Absent); Pitch 2.54 mm", PackageReference=TO-220AC, PackageVersion=Feb-1998, Published=8-Jun-2000, Publisher="Altium Limited"
J1 J2 J3 J4: library part CMP-03367-000009-1, "CONN D-SUB RCPT 9POS VERT SOLDER", Current Rating=6A, Manufacturer="TE Connectivity", Temperature="-55°C to +105°C", Temperature Range High=+105°C, Temperature Range Low=-55°C, Automotive=No, Category=Conn, ComponentLink2Description=Datasheet, ComponentLink2URL=https://www.te.com/usa-en/product-1-5747150-6.html?te_bu=Cor&te_type=other&te_campaign=oct_glo_cor-oct-global-oth-prtnr-fy19-oct-octo-buy-bom_sma-298_2&elqCampaignId=35216, Conn Gender=Female, Conn Orientation=Vertical, Contact Material=Gold,Nickel, Device Class L1=Connectors, Device Class L2="D-Sub Connectors", Device Class L3=unset, Digikey Description="CONN D-SUB RCPT 9POS VERT SOLDER", Height=12.54mm, Is Female=yes, Lead Free=Yes, Manufacturer Part Number=1-5747150-6, Mouser Description="D-Sub Standard Connectors RECP FRNT MTL SHL 9P female screwlocks", Number Of Contacts=9, Octopart=https://octopart.com/1-5747150-6-te+connectivity-39500344, Package=1-5747150-6, Pitch=2.74mm, RoHS=TRUE, Shielding=false
J5: library part CMP-2000-05119-1, "Micro USB B Type Receptacle, -55 to 85 degC, 5-Pin SMD, RoHS, Tape and Reel", Color=Black, Current Rating=1.8A, Flammability Rating=UL94V-0, Insulation Resistance=1000MOhms, Manufacturer=FCI, Operating Temperature Range=-55Cto+85C, Brand=FCI, Connector Type=MicroUSBTypeBreceptacle, Contact Material=CopperAlloy, Contact Plating=Gold, Datasheet URL=http://datasheet.octopart.com/10118193-0001LF-FCI-datasheet-55953155.pdf, Datasheet Version="Rev. C, 05/2015", Factory Pack Quantity=1200, Gender=Female, Manufacturer URL=http://www.fci.com/, Mounting Angle=Right, Number Of Contacts=5Contact, Packaging=Reel, Product=MicroUSBTypeBConnectors, Product Category=USBConnectors, RoHS=Details, Standard=USB2.0, Termination Style=SMD/SMT
L1: library part CMP-0227-00442-1, "SMD Power Inductor WE-PD2, L = 4.70 µH", Inductance="4.70 ÂµH", ComponentLink1Description="Manufacturer Link", ComponentLink1URL=http://www.we-online.com, ComponentLink2Description=Datasheet, ComponentLink2URL=http://www.we-online.de/katalog/media/pdf/744774047.pdf, DatasheetVersion="ver 2, Jun-2005", PackageDescription="SMD Inductor, 2-Leads, Body 5.8 x 5.2 mm", PackageReference=WE-PD2-M, PackageVersion=2005
oscillator1: library part ECS-160-8-30B-CKM, SPN=XC1839CT-ND
P1 P2 P4 P5 P6: "Header, 3-Pin", LatestRevisionDate=17-Jul-2002, LatestRevisionNote="Re-released for DXP Platform.", Publisher="Altium Limited"
P3: library part CN-2P-M-R10, "Male Header, Pitch 1.27 mm, 2 x 5 Position, Height 6.25 mm", Color=Black, Manufacturer=Samtec, Max Current Rating=1.75A, Max Operating Temperature=125°C, Min Operating Temperature=-55°C, Package Description="Male Header, Pitch 1.27 mm, 2 x 5 Position, Height 5.97 mm, Tail Length 4.32 mm", Package Quantity=1, Supplier Part Number 1=SAM8799-ND, Category=Connectors,Interconnects, ComponentLink1Description=https://datasheet.ciiva.com/26936/getdatasheetpartid-175877-26936879.pdf?src-supplier=Verical, ComponentLink1URL=https://datasheet.ciiva.com/26936/getdatasheetpartid-175877-26936879.pdf?src-supplier=Verical, ComponentLink2Description=https://datasheet.ciiva.com/728/ftsh-1xx-xx-xxx-dv-xxx-mkt-728872.pdf?src-supplier=Digi-Key, ComponentLink2URL=https://datasheet.ciiva.com/728/ftsh-1xx-xx-xxx-dv-xxx-mkt-728872.pdf?src-supplier=Digi-Key, ComponentLink3Description=https://datasheet.ciiva.com/10245/ftsh-mt-10245272.pdf?src-supplier=Avnet, ComponentLink3URL=https://datasheet.ciiva.com/10245/ftsh-mt-10245272.pdf?src-supplier=Avnet, ComponentLink4Description=https://datasheet.ciiva.com/16657/ftsh-mt-16657372.pdf?src-supplier=Avnet+Europe, ComponentLink4URL=https://datasheet.ciiva.com/16657/ftsh-mt-16657372.pdf?src-supplier=Avnet+Europe, ComponentLink5Description=https://datasheet.ciiva.com/22703/ftsh-smt-22703900.pdf?src-supplier=Element14, ComponentLink5URL=https://datasheet.ciiva.com/22703/ftsh-smt-22703900.pdf?src-supplier=Element14, Connector Type=Header,Unshrouded, Contact Finish=Gold, Contact Finish Thickness=10µin(0.25µm), Contact Material=Bronze, Contact Mating Length="0.120\"(3.05mm)", Contact Plating=Gold, Contact Type=MalePin, Datasheet URL=http://suddendocs.samtec.com/prints/ftsh-1xx-xx-xxx-dv-xxx-mkt.pdf, Datasheet Version="Rev. ET, 10/1995", Depth=3.43mm, Family=RectangularConnectors-Headers,MalePins, Gender=Male, Housing Color=Black, Housing Material=Polymer, Lead Free="Lead Free", Length=6.35mm, Manufacturer Part Number=FTSH-105-01-L-DV-K, Manufacturer URL=http://www.samtec.com/, Mating Products="SFMC-105-L2-S-D-TR-ND / -CONN.05\"SURFACE10POSSMT / FLE-105-01-G-DV-TR-ND / -CONNSKT1.27MM10POSDUALSMD / FLE-105-01-G-DV-A-P-ND / -CONNSKT1.27MM10POSDUALSMD / FLE-105-01-G-DV-A-ND / -CONNSKT1.27MM10POSDUALSMD / CLP-105-02-G-D-P-TR-ND / -CONNRCPT10POSDUAL.05\"SMD / SAM1155-05-ND / -CONNRCPT10POSDUAL.05\"SMD / SAM1154-05-ND / -CONNRCPT10POSDUAL.05\"SMD / SAM1153-05-ND / -CONNRCPT10POSDUAL.05\"SMD / SAM1226-05-ND / -CONNRCPT.05\"10POSDUALSMD", Mount="Surface Mount", Mounting Type=SurfaceMount, Number Of Contacts=10, Number of Positions=10, Number of Positions Loaded=All, Number of Rows=2, Orientation=Straight, Other Names=Q3937619, Package Reference=FTSH-105-01-L-DV-K, Package URL=http://suddendocs.samtec.com/prints/ftsh-1xx-xx-xxx-dv-xxx-footprint.pdf, Packaging=Tube, Pitch="0.050\"(1.27mm)", Pricing 1="1=3.13000, 10=3.00000, 100=2.50000, 500=2.12500, 1000=1.81250, 5000=1.62500 (USD)", Product Training Modules=Board-to-BoardConnectors, Radiation Hardening=No, REACH SVHC="No SVHC", RoHS=Yes, Row Spacing="0.050\"(1.27mm)", Series=FTSH, Standard Package=1, Stock 1=18140, Supplier 1=Digi-Key, Termination=Solder
P7 P8 P9: "Header, 2-Pin, Right Angle", LatestRevisionDate=17-Jul-2002, LatestRevisionNote="Re-released for DXP Platform.", Publisher="Altium Limited"
R1 R2 R3 R4: "RESISTOR, 0603, 60R4 1%, 0.1W", Case Code (Imperial)=0603, Case Code (Metric)=1608, Manufacturer=Panasonic, Manufacturer Part Number=ERJ-3EKF60R4V, Max Operating Temperature=155°C, Max Power Dissipation=100mW, Min Operating Temperature=-55°C, Package Quantity=1, Resistance=60.4R, Supplier Part Number 1=P60.4HCT-ND, Temperature Coefficient=100ppm/°C, Tolerance=1%, Voltage Rating=75V, Voltage Rating (DC)=50V, Case/Package=0603, Category="Chip SMD Resistors", ComponentLink1Description=https://datasheet.ciiva.com/28594/1678782-28594695.pdf?src-supplier=Element14, ComponentLink1URL=https://datasheet.ciiva.com/28594/1678782-28594695.pdf?src-supplier=Element14, ComponentLink2Description=https://datasheet.ciiva.com/30163/aoa0000ce2-30163208.pdf?src-supplier=Onlinecomponents.com, ComponentLink2URL=https://datasheet.ciiva.com/30163/aoa0000ce2-30163208.pdf?src-supplier=Onlinecomponents.com, ComponentLink3Description=https://datasheet.ciiva.com/5951/426256-5951371.pdf?src-supplier=Farnell, ComponentLink3URL=https://datasheet.ciiva.com/5951/426256-5951371.pdf?src-supplier=Farnell, ComponentLink4Description=https://datasheet.ciiva.com/16757/70260748-16757877.pdf?src-supplier=Allied+Electronics, ComponentLink4URL=https://datasheet.ciiva.com/16757/70260748-16757877.pdf?src-supplier=Allied+Electronics, ComponentLink5Description=https://datasheet.ciiva.com/24068/aoa0000ce2-24068761.pdf?src-supplier=Mouser, ComponentLink5URL=https://datasheet.ciiva.com/24068/aoa0000ce2-24068761.pdf?src-supplier=Mouser, ComponentLink6Description=https://datasheet.ciiva.com/16783/70260748-16783402.pdf?src-supplier=Allied+Electronics, ComponentLink6URL=https://datasheet.ciiva.com/16783/70260748-16783402.pdf?src-supplier=Allied+Electronics, ComponentLink7Description=https://datasheet.ciiva.com/28677/1678782-28677676.pdf?src-supplier=Element14, ComponentLink7URL=https://datasheet.ciiva.com/28677/1678782-28677676.pdf?src-supplier=Element14, ComponentLink8Description=https://datasheet.ciiva.com/43460/426256-43460428.pdf?src-supplier=Farnell, ComponentLink8URL=https://datasheet.ciiva.com/43460/426256-43460428.pdf?src-supplier=Farnell, ComponentLink9Description=https://datasheet.ciiva.com/46377/426256-46377437.pdf?src-supplier=Element14, ComponentLink9URL=https://datasheet.ciiva.com/46377/426256-46377437.pdf?src-supplier=Element14, Composition="Thick Film", Contact Plating=Tin, Depth=0.8mm, Features="Automotive AEC-Q200", Height=0.022inch, LatestRevisionDate=29-May-2009, LatestRevisionNote="IPC-7351 Footprint Added.", Lead Free="Lead Free", Length=1.6mm, Military Standard=Not, Mount="Surface Mount", Number of Terminations=2, PackageDescription="Chip Resistor", PackageReference=J1-0603, Packaging="Tape and Reel", Power Rating=100mW, Pricing 1="1=0.10000, 10=0.05400, 100=0.02190, 1000=0.00983, 2500=0.00853 (USD)", Published=8-Jun-2000, Publisher="Altium Limited", REACH SVHC="No SVHC", RoHS=Yes, Stock 1=97677, Supplier 1=Digi-Key, Termination=SMD/SMT, Width=0.031inch
R5: library part CMP-03412-020422-1, "RES SMD 10K OHM 0.5% 1/10W 0603", Manufacturer=Yageo, Package=AT0603, Power Rating=0.1W, Resistance=10KΩ, Temperature="-55°C to +155°C", Temperature Coefficient="25 ppm/°C", Temperature Range High=+155°C, Temperature Range Low=-55°C, Tolerance=0.005, Voltage Rating=75V, Automotive=Yes, Automotive Grade="Grade 0", Category=Res, ComponentLink2Description=Datasheet, ComponentLink2URL=http://www.yageo.com/documents/recent/PYu-AT_51_RoHS_L_5.pdf, Device Class L1="Passive Components", Device Class L2=Resistors, Device Class L3="Chip SMD Resistors", Digikey Description="RES SMD 10K OHM 0.5% 1/10W 0603", Footprint Url=http://www.yageo.com/exep/pages/download/literatures/PYu-R_Mount_9.pdf, Height=0.55mm, Ipc Land Pattern Name=RESC16080X45, Lead Free=Yes, Manufacturer Part Number=AT0603DRD0710KL, Octopart=https://octopart.com/at0603drd0710kl-yageo-67064030, RoHS=TRUE, Series=AT
R6 R7 R8 R9 R10: "VISHAY BC COMPONENTS   MCT06030C1002FP500   RESISTOR, 0603, 10KOHM, 100mW, 1PER", Case Code (Imperial)=0603, Case Code (Metric)=1608, Manufacturer=Vishay, Manufacturer Part Number=MCT06030C1002FP500, Max Operating Temperature=125°C, Max Power Dissipation=125mW, Min Operating Temperature=-55°C, Package Quantity=1, Power Rating=100mW, Resistance=10kR, Supplier Part Number 1=12AC1657, Temperature Coefficient=50ppm/°C, Tolerance=1%, Voltage Rating=75V, Case/Package=0603, Category="Chip SMD Resistors", ComponentLink1Description=https://datasheet.ciiva.com/7836/mc-pro-7836231.pdf?src-supplier=Element14, ComponentLink1URL=https://datasheet.ciiva.com/7836/mc-pro-7836231.pdf?src-supplier=Element14, ComponentLink2Description=https://datasheet.ciiva.com/2470/mc-pro-2470393.pdf?src-supplier=Digi-Key, ComponentLink2URL=https://datasheet.ciiva.com/2470/mc-pro-2470393.pdf?src-supplier=Digi-Key, ComponentLink3Description=https://datasheet.ciiva.com/48524/mc-pro-48524219.pdf?src-supplier=Avnet, ComponentLink3URL=https://datasheet.ciiva.com/48524/mc-pro-48524219.pdf?src-supplier=Avnet, ComponentLink4Description=https://datasheet.ciiva.com/16452/mc-pro-16452734.pdf?src-supplier=Future+Electronics, ComponentLink4URL=https://datasheet.ciiva.com/16452/mc-pro-16452734.pdf?src-supplier=Future+Electronics, ComponentLink5Description=https://datasheet.ciiva.com/22734/mc-pro-22734095.pdf?src-supplier=Element14, ComponentLink5URL=https://datasheet.ciiva.com/22734/mc-pro-22734095.pdf?src-supplier=Element14, ComponentLink6Description=https://datasheet.ciiva.com/2470/mc-pro-2470394.pdf?src-supplier=Digi-Key, ComponentLink6URL=https://datasheet.ciiva.com/2470/mc-pro-2470394.pdf?src-supplier=Digi-Key, ComponentLink7Description=https://datasheet.ciiva.com/2470/mc-pro-2470395.pdf?src-supplier=Digi-Key, ComponentLink7URL=https://datasheet.ciiva.com/2470/mc-pro-2470395.pdf?src-supplier=Digi-Key, ComponentLink8Description=https://datasheet.ciiva.com/5897/mc-pro-5897803.pdf?src-supplier=Farnell, ComponentLink8URL=https://datasheet.ciiva.com/5897/mc-pro-5897803.pdf?src-supplier=Farnell, ComponentLink9Description=https://datasheet.ciiva.com/16512/mc-pro-16512780.pdf?src-supplier=Avnet+Asia, ComponentLink9URL=https://datasheet.ciiva.com/16512/mc-pro-16512780.pdf?src-supplier=Avnet+Asia, ComponentLink10Description=https://datasheet.ciiva.com/16892/mc-pro-16892989.pdf?src-supplier=Avnet+Europe, ComponentLink10URL=https://datasheet.ciiva.com/16892/mc-pro-16892989.pdf?src-supplier=Avnet+Europe, ComponentLink11Description=https://datasheet.ciiva.com/9112/mc-pro-9112527.pdf?src-supplier=Avnet, ComponentLink11URL=https://datasheet.ciiva.com/9112/mc-pro-9112527.pdf?src-supplier=Avnet, Composition="Thin Film", Contact Plating=Tin, Depth=0.85mm, Height=0.022inch, LatestRevisionDate=29-May-2009, LatestRevisionNote="IPC-7351 Footprint Added.", Lead Free="Lead Free", Length=1.55mm, Military Standard=Not, Mount="Surface Mount", Number of Terminations=2, PackageDescription="Chip Resistor", PackageReference=J1-0603, Packaging="Tape and Reel", Pricing 1="1=0.02000, 5000=0.01900, 10000=0.01800, 20000=0.01700, 30000=0.01600 (USD)", Published=8-Jun-2000, Publisher="Altium Limited", Radiation Hardening=No, REACH SVHC=Unknown, RoHS=Yes, SPN=RNCP0805FTD10K0CT-ND, Stock 1=224988, Supplier 1=Newark, Voltage Rating (DC)=75V, Width=0.8mm
R11 R12: "VISHAY - CRCW060333R0FKEA. - Resistore su Chip a Mont. Superficiale, Film Spesso, 0603 [1608 Metrico], 33 ohm, Serie CRCW, 75 V", Case Code (Imperial)=0603, Case Code (Metric)=1608, Manufacturer=Vishay, Manufacturer Part Number=CRCW060333R0FKEA, Max Operating Temperature=155°C, Max Power Dissipation=100mW, Min Operating Temperature=-55°C, Package Quantity=10, Resistance=33R, Supplier Part Number 1=541-33.0HCT-ND, Temperature Coefficient=100ppm/°C, Tolerance=1%, Voltage Rating=75V, Case/Package=0603, Category="Chip SMD Resistors", ComponentLink1Description=https://datasheet.ciiva.com/11809/0900766b80d98afc-11809158.pdf?src-supplier=RSComponents, ComponentLink1URL=https://datasheet.ciiva.com/11809/0900766b80d98afc-11809158.pdf?src-supplier=RSComponents, ComponentLink2Description=https://datasheet.ciiva.com/7777/1697337-7777317.pdf?src-supplier=Element14, ComponentLink2URL=https://datasheet.ciiva.com/7777/1697337-7777317.pdf?src-supplier=Element14, ComponentLink3Description=https://datasheet.ciiva.com/7777/1720486-7777557.pdf?src-supplier=Element14, ComponentLink3URL=https://datasheet.ciiva.com/7777/1720486-7777557.pdf?src-supplier=Element14, ComponentLink4Description=https://datasheet.ciiva.com/16783/70201119-16783349.pdf?src-supplier=Allied+Electronics, ComponentLink4URL=https://datasheet.ciiva.com/16783/70201119-16783349.pdf?src-supplier=Allied+Electronics, ComponentLink5Description=https://datasheet.ciiva.com/7777/1720486-7777558.pdf?src-supplier=Element14, ComponentLink5URL=https://datasheet.ciiva.com/7777/1720486-7777558.pdf?src-supplier=Element14, ComponentLink6Description=https://datasheet.ciiva.com/16771/70201119-16771126.pdf?src-supplier=Allied+Electronics, ComponentLink6URL=https://datasheet.ciiva.com/16771/70201119-16771126.pdf?src-supplier=Allied+Electronics, ComponentLink7Description=https://datasheet.ciiva.com/2465/dcrcwe3-2465591.pdf?src-supplier=Digi-Key, ComponentLink7URL=https://datasheet.ciiva.com/2465/dcrcwe3-2465591.pdf?src-supplier=Digi-Key, ComponentLink8Description=https://datasheet.ciiva.com/2465/dcrcwe3-2465592.pdf?src-supplier=Digi-Key, ComponentLink8URL=https://datasheet.ciiva.com/2465/dcrcwe3-2465592.pdf?src-supplier=Digi-Key, ComponentLink9Description=https://datasheet.ciiva.com/2465/dcrcwe3-2465593.pdf?src-supplier=Digi-Key, ComponentLink9URL=https://datasheet.ciiva.com/2465/dcrcwe3-2465593.pdf?src-supplier=Digi-Key, ComponentLink10Description=https://datasheet.ciiva.com/16893/dcrcwe3-16893242.pdf?src-supplier=Avnet+Europe, ComponentLink10URL=https://datasheet.ciiva.com/16893/dcrcwe3-16893242.pdf?src-supplier=Avnet+Europe, Composition="Thick Film", Contact Plating=Tin, Depth=0.85mm, Features="Automotive AEC-Q200", Height=0.45mm, LatestRevisionDate=29-May-2009, LatestRevisionNote="IPC-7351 Footprint Added.", Lead Free="Lead Free", Length=1.55mm, Military Standard=Not, Mount="Surface Mount", Number of Terminations=2, PackageDescription="Chip Resistor", PackageReference=J1-0603, Packaging="Tape and Reel", Power Rating=100mW, Pricing 1="1=0.10000, 10=0.03300, 100=0.01340, 1000=0.00602, 2500=0.00522 (USD)", Published=8-Jun-2000, Publisher="Altium Limited", Radiation Hardening=No, REACH SVHC=Unknown, RoHS=Yes, SPN=541-2782-1-ND, Stock 1=59910, Supplier 1=Digi-Key, Termination=SMD/SMT, Voltage Rating (DC)=75V, Weight=7.1E-05oz, Width=0.85mm
SW1: "Switch", LatestRevisionDate=17-Jul-2002, LatestRevisionNote="Re-released for DXP Platform.", PackageDescription="Switch; 2 Leads", PackageReference=SPST-2, Published=24-Mar-1999, Publisher="Altium Limited"
TP1 TP2 TP3 TP4: library part CMP-1672-00009-1, "Test Point, Orange, 1-Pin THD, RoHS", Forward Current="3 A", Forward Voltage="1.08 V", Max Operating Temperature="150 degC", Max Surge Current="80 A", Min Operating Temperature="-65 degC", Package Quantity=500, Peak Reverse Current="600 uA", ComponentLink1Description="Manufacturer URL", ComponentLink1URL=http://www.keyelco.com/, ComponentLink2Description=Datasheet, ComponentLink2URL=http://keyelco.com/userAssets/file/M65p56.pdf, DatasheetVersion=Jun-15, Diameter="5.3 mm", Height="0.25 inch", Length="9.5 mm", Mount="Through Hole", PackageDescription="1-Pin Through Hole Device, Dia 2.54 mm", PackageReference=5003, Packaging=Bulk, Pins=2, Radiation Hardening=No, REACH SVHC="No SVHC", RoHSCompliant=true, Weight="0.01 lb", Width="0.25 inch"
U1: library part CMP-10098-000027-1, "IC TRANSCEIVER HALF 2/2 14SO", Case/Package=SO, Max Operating Temperature=125°C, Max Supply Voltage=5.5V, Min Operating Temperature=-40°C, Min Supply Voltage=4.5V, Nominal Supply Current=140mA, Package Quantity=1, Quiescent Current=500nA, Data Rate=1Mbps, Interface=CAN, Lead Free="Lead Free", Mount="Surface Mount", Number of Drivers=2, Number of Pins=14, Number of Receivers=2, Number of Transceivers=2, Operating Supply Current=140mA, Packaging="Tape and Reel", Propagation Delay=250ns, Radiation Hardening=No, Weight=0.009143oz
U2: library part MKL02Z32VFG4, "No Description Available", Max_Frequency=48, Package=QFN, ComponentLink1Description="Order from here", ComponentLink1URL=https://www.pjrc.com/store/ic_mkl02.html, Copyright="Copyright (C) 2016 Accelerated Designs. All rights reserved", CPU="ARM Cortex-M0+", Flash_KB=32, Manufacturer_Part_Number=MKL02Z32VFG4, Pin_Count=16, RefDes=RefDes, SRAM_KB=4, Type=DEV, Vendor=NXP
U3: library part Component_1
U4 U5: library part CMP-04917-000010-1, "IC REG LINEAR 3.3V 500MA SOT23-5", Ambient Temperature Range High=+70°C, Dropout Voltage=150mV, Manufacturer="Texas Instruments", Max Junction Temp=+125°C, Max Supply Voltage=5.5V, Min Supply Voltage=1.45V, Output Current=500mA, Output Voltage=3.3V, Package=DBV0005A, Temperature="-40°C to +125°C", Temperature Range Low=-40°C, Accuracy Percentage=1%, Automotive=No, Category=IC, ComponentLink2Description=Datasheet, ComponentLink2URL=http://www.ti.com/lit/ds/symlink/tlv755p.pdf, Device Class L1="Integrated Circuits (ICs)", Device Class L2="Power Management ICs", Device Class L3="Voltage Regulators - Linear", Digikey Description="IC REG LINEAR 3.3V 500MA SOT23-5", Height=1.45mm, Lead Free=Yes, Manufacturer Part Number=TLV75533PDBVR, Mouser Description="500-mA low-IQ small-size low-dropout (LDO) regulator 5-SOT-23 -40 to 125", Number Of Outputs=1, Octopart=https://octopart.com/tlv75533pdbvr-texas+instruments-91272349, Output Type=Fixed, RoHS=TRUE, Standoff Height=0mm, Temperature Range High=+125°C
U6: library part Component_1, Supplier Part Number 1=14AC8297, Supplier 1=Newark
U7: library part CMP-0192-00343-1, "+ / - 0.5 degC Maximum Accuracy Digital Temperature Sensor, 400 uA, 2.7 to 5.5 V, -40 to 125 degC, 8-pin MSOP (MS8), Tape and Reel", Manufacturer=Microchip, ComponentLink1Description="Manufacturer URL", ComponentLink1URL=http://www.microchip.com, ComponentLink2Description=Datasheet, ComponentLink2URL=http://ww1.microchip.com/downloads/en/DeviceDoc/25095A.pdf, ComponentLink3Description="Package Specification", ComponentLink3URL=http://www.microchip.com/stellent/groups/techpub_sg/documents/packagingspec/en012702.pdf, ComponentLink4Description="Product URL", ComponentLink4URL=http://www.microchip.com/MCP9808, DatasheetVersion="Rev. A", Mounting Technology="Surface Mount", PackageDescription="8-Lead Plastic Micro Small Outline Package, 3 x 3 mm Body, 0.65 mm Pitch", PackageReference=MSOP-MS8, PackageVersion=C04-111C, PartNumber=MCP9808T-E/MS
U8 U9 U10: library part CMP-0253-00403-1, "Cold Junction Compensated Thermocouple to Digital Converter, 14 Bits Temperature Resolution, -40 to 125 degC, 8-Pin SOIC (S8+4), Pb-Free", Generic Part Number=MAX31855, Code_JEDEC=MS-012, ComponentLink1Description="Manufacturer URL", ComponentLink1URL=http://www.maximintegrated.com/, ComponentLink2Description=Datasheet, ComponentLink2URL=http://datasheets.maximintegrated.com/en/ds/MAX31855.pdf, ComponentLink3Description="Package Specification", ComponentLink3URL=http://pdfserv.maximintegrated.com/package_dwgs/21-0041.PDF, DatasheetVersion="Rev. 2", Functions="Thermocouple-to-Digital Converter", Interface=SPI, Mounting Technology="Surface Mount", PackageDescription="8-Pin Small-Outline IC, Narrow, Body 3.9 x 4.9 mm, Pitch 1.27 mm", PackageReference=S8+4, PackageVersion="Rev. D, 10/2012", Parasite Pwr.=No, PartNumber=MAX31855KASA+
U11 U12 U13: "No Description Available", Copyright="Copyright (C) 2018 Accelerated Designs. All rights reserved", Manufacturer_Part_Number=MAX11192ATE+, RefDes=RefDes, SourceLibrary=Maxim_2019-05-07, Type=DEV, Vendor="Maxim Integrated Products"